# EAGLE board SKAARDUINO_v4.2 (EAGLE 7.5.0)
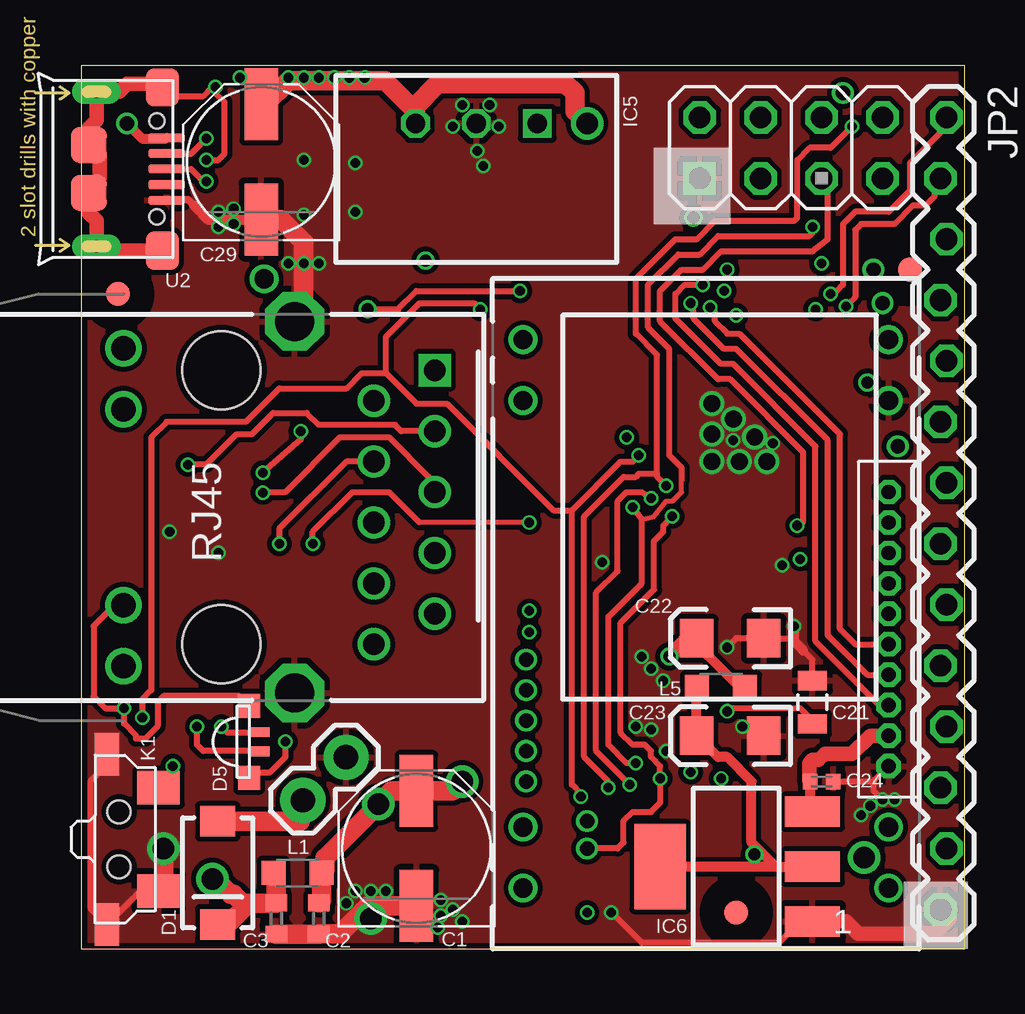
[diagram p0: board, top side]
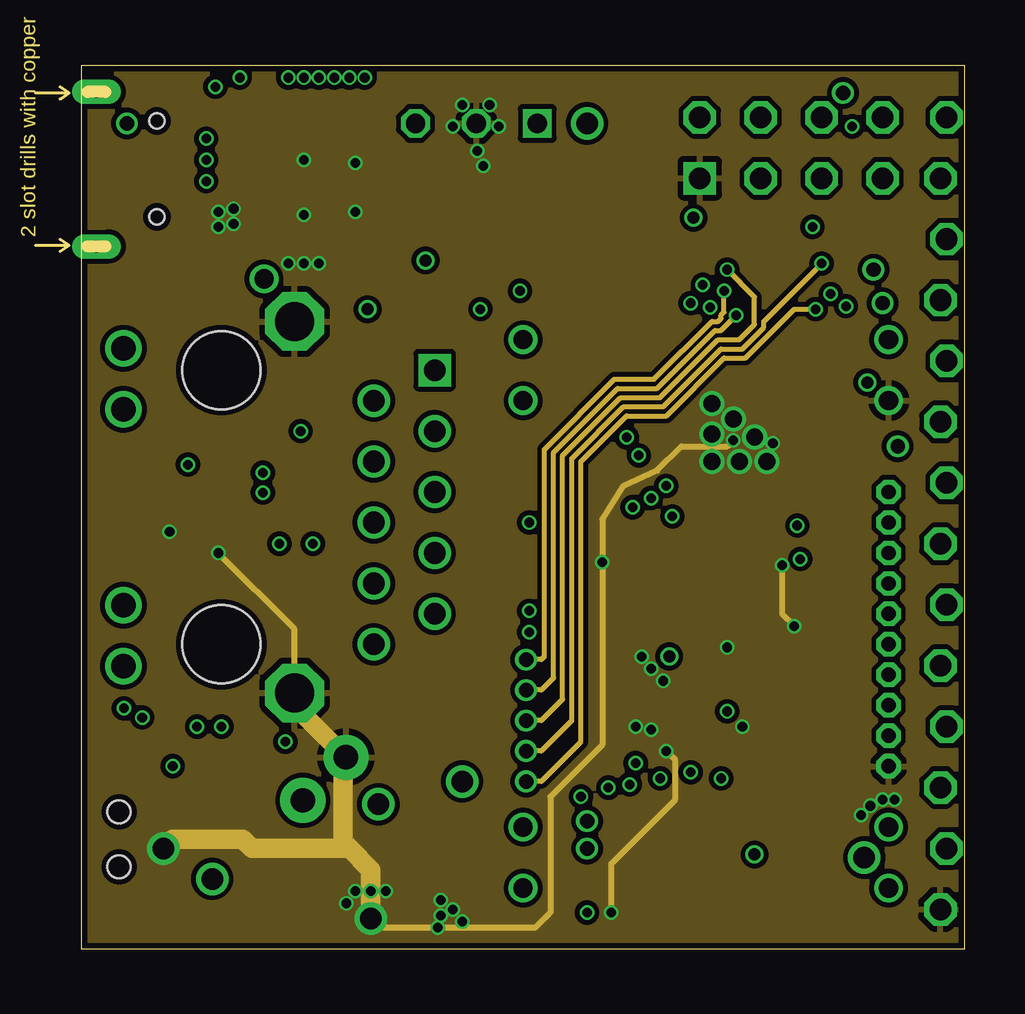
[diagram p1: board, inner layer GND]
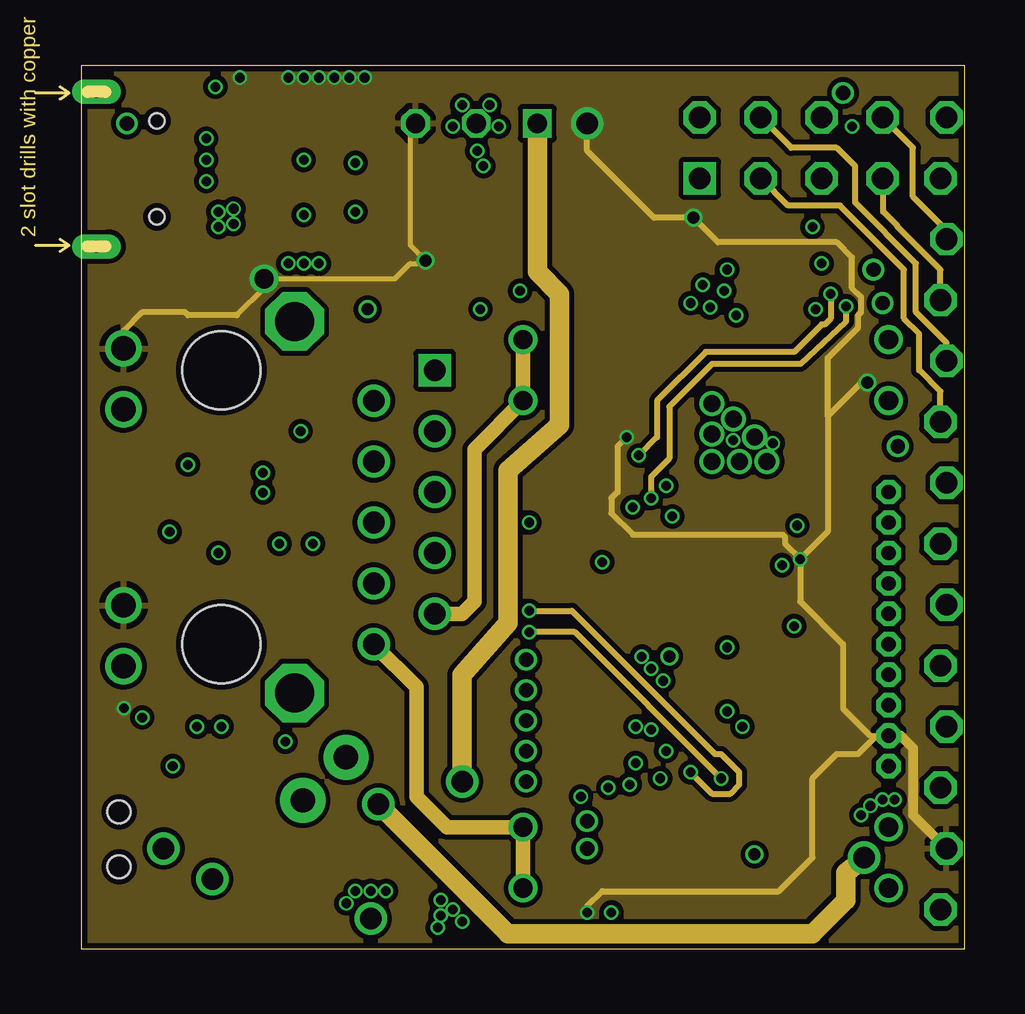
[diagram p2: board, inner layer 5V]
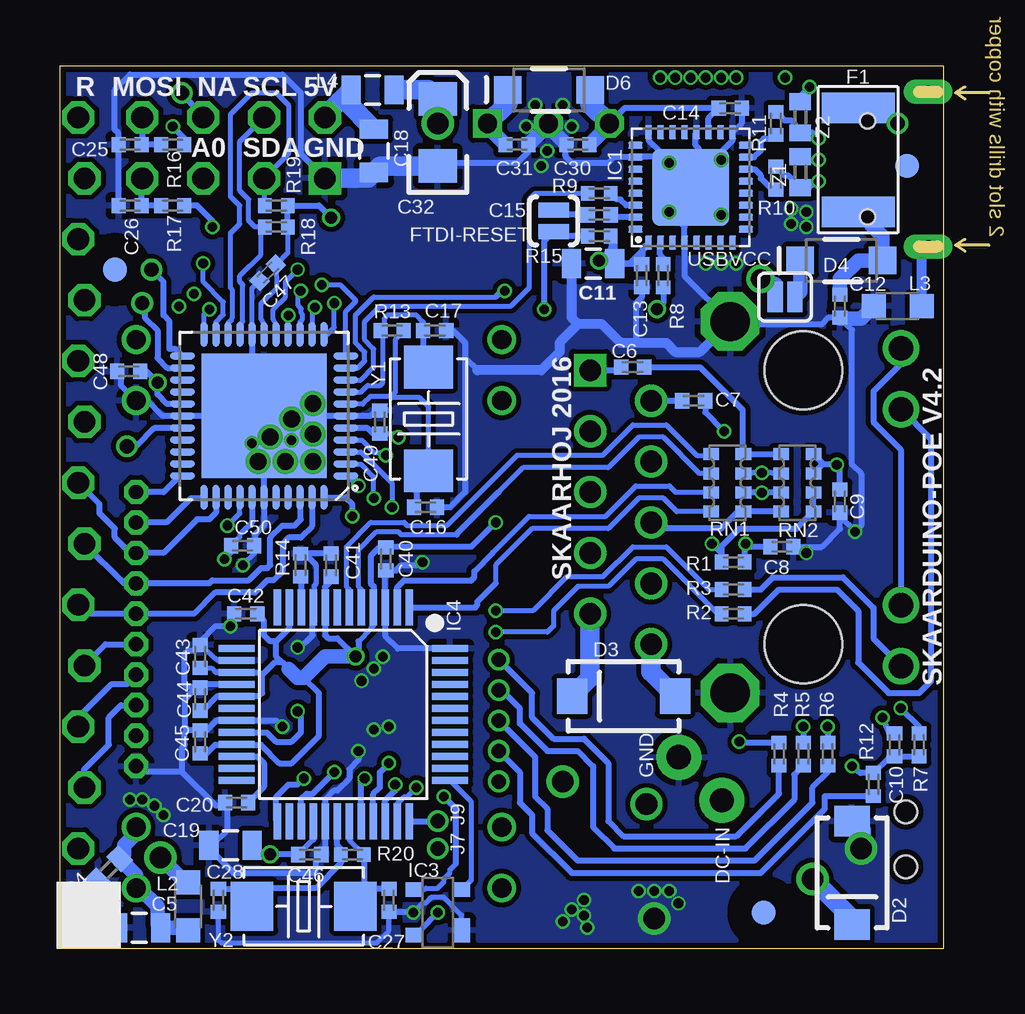
[diagram p3: board, bottom side, seen from below]

Size 36.83 x 36.83 mm. Coordinates in mm from the lower left corner, seen from the top.
Outline: 0,0 36.83,0 36.83,36.83 0,36.83 0,0
Copper layers (1*2*15*16): Top 0.035mm / dielectric 0.2mm / GND 0.0175mm / dielectric 0.3mm / 5V 0.0175mm / dielectric 0.2mm / Bottom 0.035mm
Design rules "SeeedStudio_4layer_DRU_no_angle_20140221 *": minimum track width 8mil, minimum drill 12mil, track to track 8mil, track to pad 8mil, pad to pad 8mil, via to via 8mil, smd to smd 0mil, copper to edge 10mil, drill to drill 8mil, minimum pad ring 6mil, minimum via ring 4mil, stop-mask expansion 4mil, vias tented up to drill 100mil, thermal gap 10mil
Net classes: 0 default: width 0.203 mm, clearance 0.127 mm; 1 power: width 0.203 mm, clearance 0.127 mm; 2 VIN: width 0.406 mm, clearance 0.61 mm
tKeepout: area 19.7,0 to 23,36.8
tRestrict: area 0.5,26.3 to 2.5,28.3; area 33.5,27.3 to 35.6,29.3; area 26.3,0.5 to 28.3,2.5
bRestrict: area 6.5,0.5 to 8.5,2.5; area 0.5,31.6 to 2.5,33.7; area 33.5,27.3 to 35.6,29.3

## Footprints (pad centres in the part's own frame; a part is rotated, then mirrored left to right if it is on the bottom)
PANASONIC_D = smd 3 x 1.4: + 2.4,0; - -2.4,0
C0402 = smd 0.7 x 0.9: 1 -0.65,0; 2 0.65,0
0805 = smd 0.8 x 1.2: 1 -0.9,0; 2 0.9,0
0402C = smd 0.59 x 0.64: 1 -0.48,0; 2 0.48,0
EIA3216 = smd 1.4 x 1.6: A 1.4,0; C -1.4,0
SMA-DIODE = smd 1.27 x 1.47: A -2.15,0; C 2.15,0
SOD-123 = smd 1.143 x 1.143: 1 0,0; 2 3.429,0
LED-TRICOLOR-SMD = smd 1 x 0.9: A -1.5,0; R 1.5,0 | smd 0.4 x 0.8: B 0.4,0.45; G -0.4,0.45
F1812 = smd 1.27 x 3.048: 1 -2.159,0; 2 2.159,0
FIDUCIAL-1X2.5 = smd 1 x 1: 1 0,0
SJ_2S-NO = smd 0.635 x 1.27: 1 -0.45,0; 2 0.45,0
QFN32 = smd 0.6 x 0.3: 1 -2.3,1.75; 2 -2.3,1.25; 3 -2.3,0.75; 4 -2.3,0.25; 5 -2.3,-0.25; 6 -2.3,-0.75; 7 -2.3,-1.25; 8 -2.3,-1.75; 17 2.3,-1.75; 18 2.3,-1.25; 19 2.3,-0.75; 20 2.3,-0.25; 21 2.3,0.25; 22 2.3,0.75; 23 2.3,1.25; 24 2.3,1.75 | smd 0.3 x 0.6: 9 -1.75,-2.3; 10 -1.25,-2.3; 11 -0.75,-2.3; 12 -0.25,-2.3; 13 0.25,-2.3; 14 0.75,-2.3; 15 1.25,-2.3; 16 1.75,-2.3; 25 1.75,2.3; 26 1.25,2.3; 27 0.75,2.3; 28 0.25,2.3; 29 -0.25,2.3; 30 -0.75,2.3; 31 -1.25,2.3; 32 -1.75,2.3 | smd 3.2 x 3.2: EXP 0,0
QFN-44M1 = smd 0.3 x 1.05: 1 -2.5,-3.4; 2 -2,-3.4; 3 -1.5,-3.4; 4 -1,-3.4; 5 -0.5,-3.4; 6 0,-3.4; 7 0.5,-3.4; 8 1,-3.4; 9 1.5,-3.4; 10 2,-3.4; 11 2.5,-3.4; 23 2.5,3.4; 24 2,3.4; 25 1.5,3.4; 26 1,3.4; 27 0.5,3.4; 28 0,3.4; 29 -0.5,3.4; 30 -1,3.4; 31 -1.5,3.4; 32 -2,3.4; 33 -2.5,3.4 | smd 1.05 x 0.3: 12 3.4,-2.5; 13 3.4,-2; 14 3.4,-1.5; 15 3.4,-1; 16 3.4,-0.5; 17 3.4,0; 18 3.4,0.5; 19 3.4,1; 20 3.4,1.5; 21 3.4,2; 22 3.4,2.5; 34 -3.4,2.5; 35 -3.4,2; 36 -3.4,1.5; 37 -3.4,1; 38 -3.4,0.5; 39 -3.4,0; 40 -3.4,-0.5; 41 -3.4,-1; 42 -3.4,-1.5; 43 -3.4,-2; 44 -3.4,-2.5 | smd 5.2 x 5.2: TGND 0,0
SOT143-R = smd 1 x 0.7: 1 -0.75,-1 | smd 0.6 x 0.7: 2 0.95,-1; 3 0.95,1; 4 -0.95,1
LQFP-48 = smd 1.5 x 0.3: 1 -4.45,2.75; 2 -4.45,2.25; 3 -4.45,1.75; 4 -4.45,1.25; 5 -4.45,0.75; 6 -4.45,0.25; 7 -4.45,-0.25; 8 -4.45,-0.75; 9 -4.45,-1.25; 10 -4.45,-1.75; 11 -4.45,-2.25; 12 -4.45,-2.75; 25 4.45,-2.75; 26 4.45,-2.25; 27 4.45,-1.75; 28 4.45,-1.25; 29 4.45,-0.75; 30 4.45,-0.25; 31 4.45,0.25; 32 4.45,0.75; 33 4.45,1.25; 34 4.45,1.75; 35 4.45,2.25; 36 4.45,2.75 | smd 0.3 x 1.5: 13 -2.75,-4.45; 14 -2.25,-4.45; 15 -1.75,-4.45; 16 -1.25,-4.45; 17 -0.75,-4.45; 18 -0.25,-4.45; 19 0.25,-4.45; 20 0.75,-4.45; 21 1.25,-4.45; 22 1.75,-4.45; 23 2.25,-4.45; 24 2.75,-4.45; 37 2.75,4.45; 38 2.25,4.45; 39 1.75,4.45; 40 1.25,4.45; 41 0.75,4.45; 42 0.25,4.45; 43 -0.25,4.45; 44 -0.75,4.45; 45 -1.25,4.45; 46 -1.75,4.45; 47 -2.25,4.45; 48 -2.75,4.45
RECOM_785.0-1.0 = drill 0.8 square: P$1 -2.54,0 | drill 0.8 octagon: P$2 0,0; P$3 2.54,0
SOT-223 = smd 1.27 x 2.286: 1 -2.286,-3.175; 2 0,-3.175; 3 2.286,-3.175 | smd 3.556 x 2.159: TER 0,3.175
M1X1 = drill 0.6 pad 0.813: 1 0,0
1X02 = drill 1.016 pad 1.88: 1 0,0; 2 2.54,0
M2X4SMALLER = drill 0.9 square: 1 -1.27,3.81 | drill 0.9 octagon: 2 1.27,3.81; 3 -1.27,1.27; 4 1.27,1.27; 5 -1.27,-1.27; 6 1.27,-1.27; 7 -1.27,-3.81; 8 1.27,-3.81
M10X1 = drill 0.6 pad 1.016 octagon: 1 0,0; 2 0,1.27; 3 0,2.54; 4 0,3.81; 5 0,5.08; 6 0,6.35; 7 0,7.62; 8 0,8.89; 9 0,10.16; 10 0,11.43
1X14_LOCK = drill 0.9 octagon: 1 0,0.127; 2 2.54,-0.127; 3 5.08,0.127; 4 7.62,-0.127; 5 10.16,0.127; 6 12.7,-0.127; 7 15.24,0.127; 8 17.78,-0.127; 9 20.32,0.127; 10 22.86,-0.127; 11 25.4,0.127; 12 27.94,-0.127; 13 30.48,0.127; 14 33.02,-0.127
SW4-SMD-7.0X3.5X3.5MM-90D = smd 1.397 x 1.778: 1 -2.159,1.651; 2 2.159,1.651 | smd 1.778 x 1.016: S1 -3.556,-0.508; S2 3.556,-0.508 | hole 0.95: -1.15,0; 1.15,0
L2012C = smd 1 x 1: 1 -1,0; 2 1,0
0402 = smd 0.571 x 0.62: 1 -0.48,0; 2 0.48,0
CAY16 = smd 0.5 x 0.65: 1 -1.2,-0.675; 2 -0.4,-0.675; 3 0.4,-0.675; 4 1.2,-0.675; 5 1.2,0.675; 6 0.4,0.675; 7 -0.4,0.675; 8 -1.2,0.675
HY931147C = drill 1.63 octagon: GND1 3.05,7.745; GND2 3.05,-7.745 | drill 0.9 square: P$1 8.89,5.715 | drill 0.9: P$2 6.35,4.445; P$3 8.89,3.175; P$4 6.35,1.905; P$5 8.89,0.635; P$6 6.35,-0.635; P$7 8.89,-1.905; P$8 6.35,-3.175; P$9 8.89,-4.445; P$10 6.35,-5.715 | drill 1.016: P$11 -4.08,6.625; P$12 -4.08,4.085; P$13 -4.08,-4.085; P$14 -4.08,-6.625 | hole 3.25: 0,5.715; 0,-5.715
MICRO-USB5+4P-SMD-0.65-B = smd 0.381 x 1.524: 1 -1.3,-0.25; 2 -0.65,-0.25; 3 0,-0.25; 4 0.65,-0.25; 5 1.3,-0.25 | smd 1.6 x 1.397: S1 -3.4,-0.427; S6 3.4,-0.427 | drill 0.508 pad 1.016 long: S2 -3.226,-3.175; S5 3.226,-3.175 | smd 1.5 x 1.5: S3 -1,-3.5; S4 1,-3.5 | hole 0.635: -2,-0.65; 2,-0.65
AG9800PTH = drill 0.8: P1 -7.62,11.43; P2 -7.62,8.89; P3 -7.62,-8.89; P4 -7.62,-11.43; P5 7.62,-11.43; P6 7.62,-8.89; P7 7.62,8.89; P8 7.62,11.43
SJ_2S = smd 0.635 x 1.27: 1 -0.412,0; 2 0.412,0
X2-SMD-5.0X3.2X1.3MM = smd 1.778 x 2.032: 1 -2.159,0; 2 2.159,0

## Placement (x,y rotation side)
C1  100uF/25V  [PANASONIC_D]  13.97,4.19 90 top
C2  100nF/25V  [C0402]  9.91,1.27 270 top
C3  100nF/25V  [C0402]  8.13,1.27 270 top
C4  100nF/25V  [C0402]  34.8,3.3 225 bottom
C5  10uF/25V  [0805]  33.53,0.89 180 bottom
C6  6.8nF  [0402C]  12.95,24.26 180 bottom
C7  6.8nF  [0402C]  10.41,22.86 180 bottom
C8  22nF  [0402C]  6.73,16.76 180 bottom
C9  10nF  [0402C]  4.32,18.67 90 bottom
C10  1uF  [0402C]  2.03,8.51 270 bottom
C11  22uF  [0805]  14.61,28.57 180 bottom
C12  1uF  [0402C]  4.32,26.8 90 bottom
C13  100nF  [0402C]  12.57,28.07 90 bottom
C14  100nF  [0402C]  8.89,35.05 180 bottom
C15  100nF  [0402C]  14.35,30.61 180 bottom
C16  22pF  [0402C]  21.59,18.41 180 bottom
C17  22pF  [0402C]  21.21,25.78 180 bottom
C18  22uF/6.3V  [0805]  23.75,33.27 90 bottom
C19  10uF/16V  [0805]  29.72,4.32 180 bottom
C20  10nF  [0402C]  29.46,6.1 180 bottom
C21  4.7uF  [0805]  30.48,10.29 90 top
C22  10uF 6.3V A TANT  [EIA3216]  27.05,12.95 180 top
C23  10uF 6.3V A TANT  [EIA3216]  27.05,8.89 180 top
C24  100nF  [0402C]  30.86,6.99 0 top
C25  22pF  [0402C]  33.91,33.53 0 bottom
C26  22pF  [0402C]  33.91,30.99 0 bottom
C27  18pF  [0402C]  23.11,2.03 90 bottom
C28  18pF  [0402C]  30.23,2.03 90 bottom
C29  330uF/6.3V  [PANASONIC_D]  7.5,32.81 90 top
C30  100nF  [0402C]  15.24,33.53 180 bottom
C31  100nF/25V  [0402C]  17.78,33.53 0 bottom
C32  10uF 6.3V A TANT  [EIA3216]  21.08,34.04 90 bottom
C40  100nF  [0402C]  23.24,16.26 270 bottom
C41  100nF  [0402C]  25.53,16 90 bottom
C42  100nF  [0402C]  29.08,13.97 180 bottom
C43  100nF  [0402C]  30.99,12.19 90 bottom
C44  100nF  [0402C]  30.99,10.41 90 bottom
C45  100nF  [0402C]  30.99,8.64 90 bottom
C46  100nF  [0402C]  26.42,3.94 0 bottom
C47  100nF  [0402C]  28.17,28.19 225 bottom
C48  100nF  [0402C]  33.96,24.08 180 bottom
C49  100nF  [0402C]  23.5,21.97 90 bottom
C50  100nF  [0402C]  29.21,16.81 0 bottom
D1  MBRA210LT3G  [SMA-DIODE]  5.68,3.17 270 top
D2  SMAJ58CA  [SMA-DIODE]  3.81,3.17 270 bottom
D3  SMAJ58CA  [SMA-DIODE]  13.34,10.54 180 bottom
D4  MBR0520  [SOD-123]  5.97,28.7 0 bottom
D5  KPFA-3010RGBC-11  [LED-TRICOLOR-SMD]  7,8.64 270 top
D6  MBR0520  [SOD-123]  18.16,35.81 0 bottom
F1  SMD-PPTC-500MA-15V(1812)  [F1812]  3.56,32.89 270 bottom
FID1  FIDUCIAL1X2.5  [FIDUCIAL-1X2.5]  1.52,27.3 0 top
FID2  FIDUCIAL1X2.5  [FIDUCIAL-1X2.5]  1.52,32.64 0 bottom
FID3  FIDUCIAL1X2.5  [FIDUCIAL-1X2.5]  34.54,28.32 0 top
FID4  FIDUCIAL1X2.5  [FIDUCIAL-1X2.5]  7.49,1.52 0 bottom
FID5  FIDUCIAL1X2.5  [FIDUCIAL-1X2.5]  27.3,1.52 0 top
FID8  FIDUCIAL1X2.5  [FIDUCIAL-1X2.5]  34.54,28.32 0 bottom
FTDI-RESET  SOLDERJUMPERNO  [SJ_2S-NO]  16.26,30.35 270 bottom
IC1  FT232RQ  [QFN32]  10.54,31.75 90 bottom
IC2  ATMEGA1284P  [QFN-44M1]  28.32,22.23 90 bottom
IC3  APX811-44UG-7  [SOT143-R]  21.08,1.52 90 bottom
IC4  WizNet W5500  [LQFP-48]  25.02,9.78 270 bottom
IC5  RECOM 785.0-1.0  [RECOM_785.0-1.0]  16.47,34.42 180 top
IC6  LD1117S33CTR  [SOT-223]  27.3,3.44 90 top
J1  SS  [M1X1]  18.54,10.79 0 top
J2  DC IN JACK  [1X02]  9.24,6.2 45 top
J3  SS  [M1X1]  18.54,9.53 0 top
J4  SS  [M1X1]  18.54,8.26 0 top
J5  M04X2M2X4SMALLER  [M2X4SMALLER]  29.59,33.4 90 top
J6  SS  [M1X1]  18.54,6.99 0 top
J7  SS  [M1X1]  21.08,4.19 0 bottom
J8  M10_1.27  [M10X1]  33.66,7.62 0 top
J9  W_INT  [M1X1]  21.08,5.33 0 top
J10  D11  [M1X1]  33.02,28.32 0 top
J11  D12  [M1X1]  33.4,26.92 0 top
J12  AREF  [M1X1]  34.04,20.95 0 top
J13  SS  [M1X1]  18.54,12.06 0 top
J14  SS  [M1X1]  31.75,35.69 0 top
JP2  M14LOCK  [1X14_LOCK]  35.94,34.67 270 top
K1  RESET/CFG  [SW4-SMD-7.0X3.5X3.5MM-90D]  1.57,4.57 270 top
L1  Bead ILHB0805ER121V  [L2012C]  9.02,3.17 0 top
L2  Bead ILHB0805ER121V  [L2012C]  31.5,1.78 90 bottom
L3  Bead ILHB0805ER121V  [L2012C]  1.91,26.8 180 bottom
L4  Bead ILHB0805ER121V  [0805]  23.8,35.81 0 bottom
L5  1uH 250mA 0805  [L2012C]  26.67,10.92 0 top
R1  10R/1%  [0402]  8.76,16.13 180 bottom
R2  470R  [0402]  8.76,13.97 0 bottom
R3  470R  [0402]  8.76,14.99 0 bottom
R4  390R  [0402]  6.86,8.13 90 bottom
R5  540R  [0402]  5.84,8.13 90 bottom
R6  2K7  [0402]  4.83,8.13 90 bottom
R7  10K  [0402]  1.02,8.51 90 bottom
R8  1K  [0402]  11.68,28.07 270 bottom
R9  1K  [0402]  14.35,31.5 180 bottom
R10  22R  [0402]  6.99,32.13 90 bottom
R11  22R  [0402]  6.99,34.42 90 bottom
R12  100K  [0402]  2.92,6.86 90 bottom
R13  1M  [0402]  22.99,25.78 0 bottom
R14  12K4 / 1%  [0402]  26.8,16 270 bottom
R15  10K  [0402]  14.35,29.72 0 bottom
R16  100R  [0402]  32.13,33.53 0 bottom
R17  100R  [0402]  32.13,30.99 0 bottom
R18  1K5  [0402]  27.81,30.1 0 bottom
R19  1K5  [0402]  27.81,30.99 0 bottom
R20  1M  [0402]  24.64,3.94 180 bottom
RN1  33R  [CAY16]  9.02,19.43 90 bottom
RN2  49R9 1%  [CAY16]  6.1,19.43 270 bottom
U1  HY931147C-RJ45  [HY931147C]  5.84,18.41 0 top
U2  MICRO USB  [MICRO-USB5+4P-SMD-0.65-B]  3.81,32.51 270 top
U$7  AG9800PTH  [AG9800PTH]  26.04,13.97 180 top
USBVCC  SOLDERJUMPERNC  [SJ_2S]  6.6,27.18 180 bottom
Y1  20MhZ  [X2-SMD-5.0X3.2X1.3MM]  21.46,22.1 270 bottom
Y2  25MhZ  [X2-SMD-5.0X3.2X1.3MM]  26.67,1.78 180 bottom
Z1  PGB1010603  [C0402]  5.97,32.38 90 bottom
Z2  PGB1010603  [C0402]  5.97,34.67 90 bottom

## Library data of the parts
C1 C29 L1-L3 L5 = rcl
C2-C4 C22 C23 C32 FID1-FID5 FID8 Z1 Z2 = freetronics
C5 C11 C18 C19 C21 D1-D3 FTDI-RESET J2 L4 USBVCC = SparkFun
C6-C10 C12-C17 C20 C24-C28 C30 C31 C40-C50 IC2 R1-R20 U1 = freetronics-jon
D4 D6 = MySMD
D5 IC5 IC6 J1 J3-J14 JP2 U$7 = SKAARHOJ
F1 = Seeed-OPL-fuse
IC1 = ftdichip; MPN: FT232RQ; OC_FARNELL: 1146033; OC_NEWARK: 91K9919
IC3 RN1 RN2 = freetronics-master-v1
IC4 = template
K1 = Seeed-OPL-Button; MPN: TS-1188E
U2 = Seeed-OPL-Connector; MPN: ST-USB-001G
Y1 Y2 = Seeed-OPL-crystal-osctllator; MPN: X053201602002

## Nets
3V3A: C22.A C40.1 C41.1 C42.1 C43.1 C44.1 C45.1 IC4.4 IC4.8 IC4.11 IC4.15 IC4.17 IC4.21 L5.2 R1.2 RN2.5 RN2.6
3V3D [power]: C19.1 C23.A C46.1 IC4.28 IC6.2 IC6.TER L5.1
5V [power]: C11.1 C13.2 C14.2 C24.1 C29.+ C30.1 C32.A C47.1 C48.1 C49.1 C50.1 D5.A D6.2 IC1.1 IC1.19 IC2.5 IC2.17 IC2.27 IC2.38 IC3.4 IC5.P$3 IC6.3 J8.2 JP2.13 L4.2 R7.2 R15.2 R18.2 R19.2 U1.P$11 U1.P$13 USBVCC.2
A0: IC2.37 J5.5
A2: IC2.35 J8.8 JP2.7
A3: IC2.34 J8.9
A4: IC2.33 J8.10
ACTLED: IC4.27 R3.1
CFG: IC2.21 J4.1 R12.1
CFGSW: C10.2 K1.1 R7.1 R12.2
D0_RX: IC2.9 R9.2
D1_TX: IC2.10 R8.2
D2: IC2.11 J8.3 JP2.12
D3: IC2.12 J8.4 JP2.11
D4: IC2.13 J8.5 JP2.10
D5: IC2.14 J13.1 R4.1
D6: IC2.15 J1.1 R5.1
D7: IC2.16 J3.1 R6.1
D8: IC2.42 J8.7 JP2.8
D9: IC2.43 J8.6 JP2.9
D10: IC2.22 J6.1
D10_SS: IC2.44 IC4.32 J7.1
D11: IC2.23 J10.1
D11_MOSI: IC2.1 IC4.35 R16.2
D12: IC2.24 J11.1
D12_MISO: IC2.2 IC4.34 JP2.2
D13_SCK: IC2.3 IC4.33 R17.2
GND [power]: C1.- C2.2 C3.2 C4.2 C5.2 C8.1 C9.1 C11.2 C12.1 C13.1 C14.1 C16.1 C17.1 C18.1 C19.2 C20.2 C21.2 C22.C C23.C C24.2 C25.1 C26.1 C27.1 C28.1 C29.- C30.2 C31.2 C32.C C40.2 C41.2 C42.2 C43.2 C44.2 C45.2 C46.2 C47.2 C48.2 C49.2 C50.2 D2.A IC1.4 IC1.17 IC1.20 IC1.24 IC1.26 IC2.6 IC2.18 IC2.28 IC2.39 IC2.TGND IC3.1 IC4.3 IC4.9 IC4.14 IC4.16 IC4.19 IC4.29 IC4.48 IC5.P$2 IC6.1 J2.2 J5.1 J8.1 JP2.14 K1.2 K1.S1 K1.S2 L3.2 R14.1 U1.GND1 U1.GND2 U2.5 U$7.P3
I2C_SCL: IC2.19 J5.4 JP2.5 R18.1
I2C_SDA: IC2.20 J5.3 JP2.6 R19.1
LINKLED: IC4.25 R2.1
MOSI: C25.2 J5.8 JP2.3 R16.1
N$1: C8.2 R1.1 U1.P$4
N$2: C15.2 FTDI-RESET.1
N$3: D5.B R6.2
N$4 [VIN]: C3.1 D1.C D2.C L1.1
N$5: D5.G R5.2
N$6 [VIN]: C12.2 D4.2 F1.2
N$7 [VIN]: F1.1 U2.1
N$8: C16.2 IC2.7 R13.2 Y1.2
N$9: C7.2 U1.P$2
N$10: J5.6 J14.1
N$11: C6.2 U1.P$1
N$12: C17.2 IC2.8 R13.1 Y1.1
N$13 [VIN]: D1.A J2.1
N$15: D5.R R4.2
N$16: R10.2 U2.3 Z1.1
N$17: R11.2 U2.2 Z2.1
N$18: C15.1 IC1.31
N$19 [power]: C18.2 J5.2 L4.1
N$20: C21.1 IC4.20
N$21: L3.1 U2.S1 U2.S2 U2.S3 U2.S4 U2.S5 U2.S6 Z1.2 Z2.2
N$22: C20.1 IC4.22
N$23: IC4.10 R14.2
N$24: IC4.36 J9.1
N$25: IC2.29 J12.1
N$67: R3.2 U1.P$14
N$321: C9.2 RN2.7 RN2.8 U1.P$3
N$332: R2.2 U1.P$12
POE_DC_RETURN [VIN]: C4.1 C5.1 L2.1 U$7.P1 U$7.P2
POE_VIN+ [VIN]: D3.C U1.P$9 U$7.P5 U$7.P6
POE_VIN- [VIN]: D3.A U1.P$10 U$7.P7 U$7.P8
RD+: IC1.14 R10.1
RD-: IC1.15 R11.1
RESET: C10.1 FTDI-RESET.2 IC2.4 IC3.3 JP2.1 R15.1
RXIN: IC4.5 RN1.6
RXIN_E: C7.1 RN1.3 RN2.2
RXIP: IC4.6 RN1.5
RXIP_E: C6.1 RN1.4 RN2.1
SCLK: C26.2 J5.7 JP2.4 R17.1
TXON: IC4.1 RN1.8
TXON_E: RN1.1 RN2.4 U1.P$6
TXOP: IC4.2 RN1.7
TXOP_E: RN1.2 RN2.3 U1.P$5
USBRXD: IC1.30 R9.1
USBTXD: IC1.2 R8.1
USBVCC [VIN]: D4.1 USBVCC.1
VIN [VIN]: C1.+ C2.1 C31.1 D6.1 IC5.P$1 L1.2 L2.2
WIZRST: IC3.2 IC4.37
XTLN: C28.2 IC4.30 R20.2 Y2.2
XTLP: C27.2 IC4.31 R20.1 Y2.1

## Tracks (layer width: path | path; a pad name or v marks a point on that pad's centre or on a via)
3V3A  (via drill 0.4, 0.5)
  Top 0.203: v18.67,17.78 14.1,17.78
  Top 0.254: v9.65,16.89 9.65,17.4 11.3,19.05 12.83,19.05 14.1,17.78
  Top 0.406: L5.2 27.43,10.92 26.1,12.26 26.1,12.51 C22.A
  Top 0.61: C22.A 25.27,12.95 v24.51,12.19
  Bottom 0.203: C43.1 30.51,11.71 30.35,11.56 | 24.38,12.83 23.88,13.34 23.88,13.36 23.77,13.46 IC4.4
  Bottom 0.254: RN2.6 RN2.5 6.13,17.53 8.51,17.53 9.24,16.79 R1.2 9.24,16.48 v9.65,16.89 | IC4.4 23.75,14.25 23.75,15.11 23.88,15.24 23.88,16.38 23.52,16.74 C40.1 23.21,16.76 19.68,16.76 v18.67,17.78 | C41.1 25.53,15.34 25.78,15.09 IC4.8 | IC4.8 | 27.3,14.19 IC4.11 27.27,13.37 27.81,12.83 | 27.81,12.83 28.07,12.83 28.32,13.08 28.32,13.69 C42.1 | 30.35,11.56 29.5,11.56 IC4.15 28.55,11.53 28.4,11.43 | C44.1 30.88,9.93 30.28,10.54 29.48,10.54 | 29.48,10.54 IC4.17 | C45.1 30.71,8.16 30.35,8.51 29.49,8.51 | 29.49,8.51 IC4.21 | 29.49,8.51 28.45,8.51 27.69,7.75 27.18,7.75 26.04,8.89 26.04,10.67 26.67,11.3 | 24.38,12.83 24.38,12.32 v24.51,12.19 25.27,12.95 C22.A 25.78,13.08 IC4.8 | 29.48,10.54 28.57,10.54 28.4,10.67 28.4,11.43 | 27.56,11.94 27.81,12.19 27.81,12.83 | 27.3,11.68 27.56,11.94 | 27.56,11.94 27.89,11.94 28.4,11.43
  Bottom 0.61: v24.51,12.19 25.78,12.19 26.67,11.3 26.92,11.3 27.3,11.68
3V3D  (via drill 0.5)
  Top 0.254: 27.94,4.45 27.94,4.06 v28.07,3.94
  Top 0.406: 28.95,3.44 IC6.TER | 28.95,3.44 27.94,4.45 27.94,6.99 26.92,8 26.54,8 C23.A 25.65,10.9 L5.1 | 28.95,3.44 IC6.2
  Bottom 0.203: 26.27,4.56 C46.1
  Bottom 0.254: IC4.28 26.27,4.56 | C46.1 v28.07,3.94 28.44,3.94 C19.1
5V  (via drill 0.4, 0.5, 0.8, 0.9)
  Top 0.254: D5.A 6.59,10.54 3.43,10.54 3.17,10.29 3.17,9.27 2.67,8.76 2.29,8.76 2.29,8.89 1.78,9.4 v1.78,10.03 1.02,10.03 0.51,10.54 0.51,13.46 1.38,14.33 U1.P$13
  Top 0.406: C24.1 30.38,5.82 IC6.3
  Top 0.61: C24.1 30.35,7.01 30.35,7.75 30.48,7.87 30.73,7.87 30.99,8.13 32.13,8.13 32.89,8.89 J8.2
  Top 0.813: v21.08,34.42 20.57,34.92 20.57,35.69 20.19,36.07 14.86,36.07 13.93,35.14 13.93,34.92 | 13.93,34.92 IC5.P$3 | C29.+ 7.65,35.21 8.64,36.2 12.66,36.2 13.93,34.92
  5V 0.203: IC5.P$3 13.72,34.2 13.72,29.34 v14.35,28.7 14.22,28.57 C11.1 13.07,27.94 v7.62,27.94 7.62,27.56 6.48,26.42
  5V 0.254: U1.P$11 1.76,25.77 2.54,26.54 4.32,26.54 4.45,26.42 6.48,26.42 | v21.08,34.42 21.08,33.27 23.88,30.48 v25.53,30.48 26.54,29.46 31.5,29.46 32.13,28.83 32.13,27.56 32.51,27.18 32.51,26.54 32.38,26.42 32.38,25.91 31.11,24.64 31.11,22.23 | v21.08,1.52 21.08,1.78 21.72,2.41 29.08,2.41 30.48,3.81 30.48,7.11 31.5,8.13 32.38,8.13 33.15,8.89 | v29.97,16.26 29.97,14.48 31.75,12.7 31.75,10.03 32.89,8.89 33.15,8.89 | v22.73,21.34 22.35,20.95 22.35,19.05 22.1,18.8 22.1,18.16 22.99,17.27 29.23,17.27 29.34,17.17 29.34,16.89 v29.97,16.26 | v32.77,23.62 32.51,23.62 31.11,22.23 | 31.11,22.23 31.11,17.4 v29.97,16.26 | 33.15,8.89 J8.2
  5V 0.406: J8.2 34.16,8.89 34.67,8.38 34.67,5.59 JP2.13
  Bottom 0.203: IC3.4 22.08,0.78 | IC2.17 28.32,26.04 28.45,26.26 28.45,26.92 27.8,27.54 C47.1 27.33,29.03 R18.2 | R15.2 13.87,29.24 13.84,29.21 v14.35,28.7 | 29.21,17.4 29.34,17.27 29.34,17.17 C50.1 29.69,16.54 v29.97,16.26 | C49.1 22.89,21.49 v22.73,21.34
  Bottom 0.254: R7.2 1.02,9.27 v1.78,10.03 | U1.P$11 1.76,24.4 2.92,23.24 2.92,21.97 1.78,20.83 1.78,14.35 U1.P$13 | C11.1 13.68,28.55 C13.2 12.54,29.21 IC1.1 12.29,29.36 13.08,28.57 C11.1 | C11.1 | 24.66,21.72 IC2.5 24.91,21.72 24,21.72 23.78,21.49 C49.1 | IC2.38 28.83,18.82 28.83,17.78 29.21,17.4 | IC1.19 9.79,34.63 C14.2 13.29,35.05 IC5.P$3 | C11.1 13.71,29.55 R15.2 | R18.2 R19.2 26.04,30.99 v25.53,30.48 | 22.08,0.78 21.83,0.78 v21.08,1.52 | C48.1 33.22,24.08 v32.77,23.62 32.77,23.11 32.38,22.73 IC2.27
  Bottom 0.61: C30.1 13.93,34.36 IC5.P$3 | USBVCC.2 7.02,27.72 v7.62,27.94
  Bottom 0.813: IC5.P$3 14.73,35.22 D6.2 | L4.2 21.46,35.81 C32.A v21.08,34.42
  other vias: 6.6,36.32 8.64,36.32 9.27,36.32 9.91,36.32 10.54,36.32 11.18,36.32 11.81,36.32
  pour 5V: 0,0 36.83,0 36.83,36.83 0,36.83
A0  (via drill 0.4)
  Top 0.254: J5.5 31.11,31.88 31.11,29.59 30.48,29.08 26.67,29.08 25.91,28.32 25.02,28.32 24.13,27.43 24.13,26.16 26.54,23.75 27.05,23.75 30.1,20.7 30.1,17.78 29.97,17.78 v29.84,17.65
  Bottom 0.203: v29.84,17.65 29.34,18.16 29.34,18.81 IC2.37
A2
  Bottom 0.254: IC2.35 30.32,18.19 30.61,17.91 31.11,17.91 32.51,16.51 J8.8 33.91,16.51 34.54,17.14 34.54,17.53 35.18,18.16 35.18,18.54 JP2.7
A3
  Bottom 0.254: IC2.34 30.85,18.8 31.37,18.8 32.38,17.78 J8.9
A4
  Bottom 0.254: IC2.33 31.84,19.73 32.51,19.05 J8.10
ACTLED  (via drill 0.4)
  5V 0.254: v25.4,7.37 26.29,6.48 27.05,6.48 27.43,6.86 27.43,7.37 26.67,8.13 26.42,8.13 20.45,14.1 v18.67,14.1
  Bottom 0.203: R3.1 9.78,14.99 11.56,16.76 12.95,16.76 14.2,15.52 15.7,15.52 17.12,14.1 v18.67,14.1
  Bottom 0.254: IC4.27 26.77,6.25 26.54,6.48 26.29,6.48 v25.4,7.37
CFG  (via drill 0.4)
  GND 0.203: v30.86,28.57 28.45,26.16 28.45,25.91 27.56,25.02 26.67,25.02 24.26,22.61 22.61,22.61 20.45,20.45 20.45,9.53 19.18,8.26 J4.1
  Bottom 0.203: IC2.21 30.32,26.14 30.02,26.44 30.02,26.98 30.86,27.81 v30.86,28.57
  Bottom 0.254: J4.1 17.65,7.37 17.65,6.1 17.14,5.59 17.14,4.83 15.49,3.17 7.62,3.17 4.95,5.84 4.95,6.35 4.92,6.38 R12.1
CFGSW  (via drill 0.4)
  Top 0.254: v3.81,7.62 3.48,6.99 K1.1
  Bottom 0.254: R7.1 C10.2 2.09,7.97 2.29,7.97 R12.2 3.46,7.34 v3.81,7.62
D0_RX
  Bottom 0.203: IC2.9 24.28,23.73 23.75,24.26 23.75,25.02 24.13,25.4 24.13,26.16 23.5,26.8 18.03,26.8 17.27,27.56 17.27,31.24 17.02,31.5 R9.2
D1_TX  (via drill 0.4, 0.5)
  Top 0.254: v11.94,26.67 13.21,26.67 13.97,27.43 v18.29,27.43
  Bottom 0.203: IC2.10 24.42,24.23 24.13,24.51 24.13,24.89 24.51,25.27 24.51,26.42 23.75,27.18 18.67,27.18
  Bottom 0.254: R8.2 11.68,26.92 v11.94,26.67 | v18.29,27.43 18.41,27.43 18.67,27.18
D2  (via drill 0.4)
  Top 0.254: v25.91,27.69 25.15,27.69 24.77,27.3 24.77,26.29 26.67,24.38 27.18,24.38 30.61,20.95 30.61,12.83 33.27,10.16 J8.3
  Bottom 0.203: IC2.11 24.92,26.57 24.51,26.98 24.51,27.05 25.15,27.69 v25.91,27.69
  Bottom 0.254: JP2.12 35.81,7.49 34.8,8.51 34.8,9.65 34.29,10.16 J8.3
D3  (via drill 0.4)
  Top 0.254: v25.4,26.92 25.53,26.8 25.53,26.29 26.8,25.02 27.3,25.02 31.11,21.21 31.11,13.08 32.77,11.43 J8.4
  Bottom 0.203: IC2.12 25.68,25.62 25.4,25.91 v25.4,26.92
  Bottom 0.254: JP2.11 36.07,9.65 34.67,11.05 34.04,11.05 J8.4
D4  (via drill 0.4)
  Top 0.254: v26.21,26.75 26.42,26.54 26.42,26.16 26.92,25.65 27.43,25.65 31.62,21.46 31.62,13.34 32.26,12.7 J8.5
  Bottom 0.203: 26.29,25.66 26.29,26.67 v26.21,26.75
  Bottom 0.254: 26.29,25.66 IC2.13 | JP2.10 34.92,12.7 J8.5
D5  (via drill 0.4)
  GND 0.203: v26.8,27.43 26.8,26.54 26.67,26.42 26.67,26.29 26.54,26.16 26.29,26.16 23.88,23.75 22.23,23.75 19.3,20.83 19.3,12.19 19.18,12.06 J13.1
  Bottom 0.203: IC2.14 26.82,26.14 26.72,26.24 26.72,26.47 26.77,26.52 26.77,26.7 26.9,26.82 26.9,27.33 v26.8,27.43
  Bottom 0.254: J13.1 17.14,10.67 17.14,9.65 16.26,8.76 14.99,8.76 13.97,7.75 13.97,5.33 13.34,4.7 8.64,4.7 6.86,6.48 R4.1
D6  (via drill 0.4)
  GND 0.203: v27.3,26.42 26.67,25.78 26.42,25.78 24,23.37 22.35,23.37 19.68,20.7 19.68,11.3 19.18,10.79 J1.1
  Bottom 0.203: IC2.15 27.32,26.4 v27.3,26.42
  Bottom 0.254: J1.1 18.41,10.79 17.65,10.03 17.65,9.4 16.51,8.26 15.24,8.26 14.61,7.62 14.61,5.08 13.72,4.19 8.26,4.19 6.22,6.22 6.22,7.27 R5.1
D7  (via drill 0.4)
  GND 0.203: v26.92,28.32 28.07,27.18 28.07,26.04 27.43,25.4 26.54,25.4 24.13,22.99 22.48,22.99 20.07,20.57 20.07,10.41 19.18,9.53 J3.1
  Bottom 0.203: IC2.16 27.82,26.04 27.94,26.24 27.94,26.67 27.43,27.18 27.43,27.81 v26.92,28.32
  Bottom 0.254: J3.1 17.02,8 17.02,6.35 16.51,5.84 16.51,4.95 15.24,3.68 7.87,3.68 5.46,6.1 5.46,6.73 4.83,7.37 R6.1
D8
  Bottom 0.254: IC2.42 26.8,18.8 26.8,17.91 27.05,17.65 27.56,17.65 28.07,17.14 28.07,16 28.19,15.88 28.45,15.88 28.96,15.37 30.48,15.37 30.61,15.24 J8.7 34.16,15.24 JP2.8
D9
  Bottom 0.254: IC2.43 26.32,17.62 26.8,17.14 27.3,17.14 27.56,16.89 27.56,15.75 27.94,15.37 28.19,15.37 28.7,14.86 30.35,14.86 31.24,13.97 J8.6 35.69,13.97 JP2.9
D10  (via drill 0.4)
  GND 0.203: v30.61,26.67 29.72,26.67 27.69,24.64 26.8,24.64 24.38,22.23 22.73,22.23 20.83,20.32 20.83,8.64 19.18,6.99 J6.1
  Bottom 0.203: IC2.22 30.82,26.46 v30.61,26.67
D10_SS  (via drill 0.4)
  Top 0.254: J7.1 22.35,4.19 22.61,4.45 22.61,5.33 22.99,5.71 23.75,5.71 24.13,6.1 v24.13,7.11 24.13,7.62 23.75,8 23.75,8.26 23.5,8.51 22.99,8.51 22.48,9.02 22.48,13.59 23.88,14.99 23.88,17.02 24.26,17.4 24.26,17.65 v24.64,18.03
  Bottom 0.254: IC2.44 24.92,18.82 24.64,18.54 v24.64,18.03 | IC4.32 24.27,6.97 v24.13,7.11
D11
  Bottom 0.254: IC2.23 32.02,25.02 32.26,25.02 32.26,26.16 32.51,26.42 32.51,27.81 J10.1
D11_MOSI  (via drill 0.4)
  Top 0.254: 24.13,19.56 v24.38,19.3 24,19.68 24,19.81 | v21.97,6.73 21.97,6.99 20.95,8 20.95,18.03 22.61,19.68 23.11,19.68 23.24,19.81 24,19.81 | 24,19.81 24,24.77 23.11,25.65 23.11,27.94 24.77,29.59 25.65,29.59 26.42,30.35 29.72,30.35 29.84,30.48 29.84,32.89 30.35,33.4 31.24,33.4 v32.13,34.29
  Bottom 0.203: IC4.35 22.77,6.06 22.48,6.35 22.35,6.35 v21.97,6.73
  Bottom 0.254: IC2.1 24.8,19.73 v24.38,19.3 | R16.2 31.52,33.4 31.52,33.68 v32.13,34.29
D12
  Bottom 0.254: 31.75,24.26 IC2.24 32.35,24.23 32.77,24.64 32.77,25.78 33.27,26.29 33.27,26.8 J11.1
D12_MISO  (via drill 0.4)
  Top 0.254: v22.86,6.86 21.46,8.26 21.46,14.86 22.35,15.75 22.35,18.67 22.73,19.05 23.37,19.05 v23.75,18.8 | v31.88,26.8 32.26,27.18 32.26,29.97 32.51,30.23 33.91,30.23 34.67,30.99 35.18,30.99 35.56,31.37 35.56,31.88 JP2.2
  5V 0.254: v23.75,18.8 23.75,19.68 24.51,20.45 24.51,22.61 26.29,24.38 29.97,24.38 31.88,26.16 v31.88,26.8
  Bottom 0.203: v23.75,18.8 23.75,19.68 24.26,20.19 24.89,20.19
  Bottom 0.254: 24.89,20.19 IC2.2 | IC4.34 23.27,6.2 22.86,6.6 v22.86,6.86
D13_SCK  (via drill 0.4)
  Top 0.203: 23.37,17.91 23.88,18.03 24.38,18.67 24.64,18.67 25.02,19.05 25.02,19.56
  Top 0.254: v23.11,7.75 22.73,7.75 21.97,8.51 21.97,13.84 23.37,15.24 23.37,17.91 v22.99,18.41 | 25.02,19.56 25.02,20.07 24.51,20.57 24.51,25.02 23.62,25.91 23.62,27.69 24.89,28.96 25.78,28.96 26.54,29.72 30.35,29.72 30.48,29.84 v30.48,30.1
  Bottom 0.203: IC2.3 24.28,20.73 22.99,19.43 v22.99,18.41
  Bottom 0.254: IC4.33 23.77,6.46 23.5,6.73 23.5,7.37 v23.11,7.75 | v30.48,30.1 30.48,30.35 31.11,30.99 R17.2
GND  (via drill 0.4, 0.7, 0.9)
  Top 0.254: K1.S1 1.06,7.67 0.38,6.99 0.38,1.7 K1.S2 2.46,2.41 K1.2 | C23.C 28.19,8.89 v27.56,9.27 | v26.92,12.57 27.3,12.95 C22.C 29.59,12.95 29.72,12.83 | C21.2 30.48,12.06 29.84,12.7 | C24.2 33.02,6.99 | 33.02,6.99 J8.1 | 33.02,6.99 33.02,6.6 v33.4,6.22 | IC6.1 29.98,1.15 29.08,0.25 23.37,0.25 v22.1,1.52
  Top 0.305: U2.5 3.59,31.24 4.45,31.24 4.7,30.99
  Top 0.406: 30.1,12.45 29.84,12.7 29.72,12.83 v29.72,13.46 | 4.7,30.99 5.28,30.41 C29.-
  Top 0.61: IC6.1 31.87,1.15 32.38,0.64 35.56,0.64 36.2,1.27 JP2.14
  Top 0.813: C3.2 C2.2 9.92,0.64 10.79,0.64 11.75,1.59 | 11.75,1.59 11.95,1.79 C1.- | v12.06,1.27 11.75,1.59 | K1.2 3.43,2.62 v3.43,4.19 | C29.- 8.32,30.41 9.27,29.46 9.27,26.54 U1.GND1
  GND 0.254: U1.GND2 8.89,13.33 v5.71,16.51 | v22.1,1.52 22.1,3.56 24.77,6.22 24.77,7.87 v24.38,8.26 | v27.18,21.21 26.92,20.95 25.02,20.95 24,19.94 22.61,19.3 21.72,17.91 v21.72,16.13 21.72,8.51 19.56,6.35 19.56,1.52 18.92,0.89 12.45,0.89 v12.06,1.27 | v29.21,16 29.21,13.97 v29.72,13.46
  GND 0.813: U1.GND2 8.89,10.13 J2.2 10.92,7.88 10.92,4.45 11.18,4.19 | 11.18,4.19 12.06,3.3 v12.06,1.27 | v3.43,4.19 3.81,4.57 6.73,4.57 7.11,4.19 11.18,4.19
  Bottom 0.203: 26.16,16 26.16,15.21 26.24,15.14 26.24,14.26 | 30.96,12.67 30.25,12.04 29.5,12.04 | IC2.39 28.32,20.19 28.45,20.32 | v28.57,20.32 28.57,20.83 v28.83,21.08 | C28.1 30.23,0.38 30.1,0.25 23.62,0.25 23.11,0.76 C27.1 | IC2.18 28.82,27.54 C47.2 | IC3.1 20.08,1.41 20.83,2.16 21.34,2.16 21.59,1.91 21.72,1.91 v22.1,1.52 | 28.7,16.66 28.7,16.51 v29.21,16
  Bottom 0.254: 4.42,18.16 C9.1 | v5.71,16.51 5.71,16.74 C8.1 5.08,16.76 4.32,17.53 C9.1 | C14.1 8.41,34.43 IC1.17 8.79,33.7 9.35,33.15 | 9.35,33.15 10.19,33.15 10.21,33.17 | 10.21,33.17 10.21,33.38 10.34,33.5 10.34,34 IC1.20 | IC1.24 12.29,33.7 11.84,33.25 11.84,33.22 11.63,33.02 | 11.63,33.02 12.82,33.02 IC1.26 13.74,33 13.97,32.77 15.49,32.77 15.75,33.02 15.75,33.5 C30.2 | 11.63,33.02 11.56,33.02 | 11.56,33.02 10.36,33.02 10.21,33.17 | 9.35,33.15 9.27,33.07 v9.27,32.89 v9.27,30.61 | 11.56,33.02 11.43,32.89 v11.43,32.77 v11.43,30.73 10.79,30.09 IC1.4 10.79,28.06 U1.GND1 8.77,26.04 5.08,26.04 4.8,26.32 C12.1 3.81,25.81 3.81,20.19 3.43,19.81 3.43,17.65 v3.68,17.4 4.32,18.03 C9.1 | C49.2 23.65,22.45 23.88,22.23 IC2.6 IC2.TGND | C17.1 20.45,25.78 19.94,25.27 19.94,24.64 | 19.94,24.64 19.94,19.05 20.57,18.41 C16.1 | 19.94,24.64 19.43,24.13 | C41.2 R14.1 26.64,16.48 26.16,16 | 26.24,14.26 IC4.9 26.29,14.21 26.29,13.08 26.54,12.83 v26.92,12.57 | C43.2 30.96,12.67 31.11,12.83 | 29.5,12.04 IC4.14 | 29.84,9.53 | IC2.18 28.82,22.73 IC2.TGND | IC2.TGND IC2.28 32.56,22.23 33.2,22.86 U$7.P3 34.29,23.5 34.29,23.93 C48.2 | IC2.TGND IC2.39 28.32,17.65 28.7,17.27 28.7,16.66 C50.2 | C46.2 25.94,4.16 | 31.14,9.27 C45.2 | C27.1 22.13,1.55 v22.1,1.52 | IC4.48 22.75,12.53 23.27,13.05 IC4.3 23.27,15.75 C40.2 22.83,15.78 22.61,16 21.84,16 v21.72,16.13 | C42.2 29.56,13.87 v29.72,13.46 30.35,13.46 30.99,12.83 C43.2 | v27.18,21.21 27.3,21.21 IC2.TGND | 29.84,9.53 30.3,9.53 30.71,9.12 C45.2 | 31.5,9.14 31.62,9.27 31.62,10.41 31.14,10.89 C44.2 30.85,11.03 IC4.16 31.01,11.03 31.11,10.92 31.5,10.92 31.62,11.05 31.62,12.32 31.5,12.45 31.21,12.45 C43.2
  Bottom 0.254: 31.5,9.14 31.02,9.14 C45.2 | 31.5,9.14 31.62,9.02 31.62,8.51 31.75,8.38 31.75,7.39 | v24.38,8.26 24.38,7.87 24.77,7.49 24.77,7.11 25.27,6.6 25.4,6.6 25.78,6.22 IC4.29 25.77,4.1 C46.2 | 29.84,9.53 IC4.19 27.81,9.53 v27.56,9.27 | C13.1 12.57,27.18 12.83,26.92 12.83,25.4 12.7,25.27 | C31.2 17.3,33.25 17.78,32.77 20.95,32.77 C32.C | C25.1 C26.1 34.39,34.01 34.54,34.16 34.54,35.81 33.91,36.45 27.56,36.45 26.8,35.69 26.8,33.15 J5.1 | C46.2 26.16,3.71 26.16,3.3 26.29,3.17 29.59,3.17 30.62,4.2 C19.2 30.48,4.32 29.84,4.95 29.84,6 C20.2 30.07,5.97 30.32,5.97 31.75,7.39 | 31.75,7.39 33.43,7.39 J8.1
  Bottom 0.406: U1.GND1 10.16,24.89 11.18,24.89 11.56,25.27 12.7,25.27 13.46,25.27 14.23,26.05 15.23,26.05 | 15.23,26.05 16,25.27 16,24.89 16.76,24.13 19.43,24.13 | C11.2 15.51,26.32 15.23,26.05
  Bottom 0.61: L3.2 2.92,26.8 3.43,26.29 4.29,26.29 C12.1 | v26.29,22.73 26.54,22.73 v27.18,22.1 v27.18,21.21 | 27.3,21.21 27.94,21.21 v28.07,21.34 | v28.57,20.32 28.45,20.32 v27.43,20.32 27.43,20.95 v27.18,21.21 | v26.29,21.46 26.92,21.46 v27.18,21.21 | v26.29,20.32 v27.18,21.21 | C30.2 16.47,34.28 IC5.P$2 16.47,34.36 C31.2 | C4.2 35.26,2.21 JP2.14 35.05,0.89 C5.2
  Bottom 0.813: D2.A 3.43,4.94 v3.43,4.19 | J5.1 23.99,32.13 C18.1 23.49,32.64 C32.C
  other vias: 23.37,12.19 23.75,11.68 24.26,11.18 23.11,9.27 23.75,9.14 32.51,5.59 32.89,5.97 33.91,6.22 14.99,2.03 14.99,1.4 14.86,0.89 15.49,1.65 15.88,1.14 12.7,2.41 12.06,2.41 11.43,2.41 11.05,1.91 15.49,34.29 17.4,34.29 16.51,33.27 16.76,32.64 15.88,35.18 17.02,35.18 8.64,28.57 9.27,28.57 9.91,28.57 5.71,30.1 6.35,30.23 6.35,30.86 5.71,30.73
  pour Bottom: 0,0 36.83,0 36.83,36.83 0,36.83
  pour GND: 0,0 36.83,0 36.83,36.83 0,36.83
  pour Top: 0,0 36.83,0 36.83,36.83 0,36.83
I2C_SCL
  5V 0.254: JP2.5 36.07,25.27 34.8,26.54 34.8,28.57 32.26,31.11 32.26,32.64 31.5,33.4 29.59,33.4 J5.4
  Bottom 0.203: IC2.19 29.32,26.05 29.21,26.16 29.21,27.69 29.34,27.81 29.34,28.07 28.45,28.96 28.45,29.94 R18.1 28.7,30.1 28.96,30.35 28.96,31.24 29.34,31.62 29.34,33.66 J5.4
I2C_SDA
  5V 0.254: JP2.6 35.81,23.24 34.92,24.13 34.92,25.65 34.29,26.29 34.29,28.32 31.62,30.99 29.46,30.99 J5.3
  Bottom 0.203: IC2.20 29.82,26.08 29.69,26.21 29.69,26.24 29.64,26.34 29.64,27.48 29.72,27.56 29.72,29.84 29.34,30.23 29.34,30.99 29.72,31.37 29.72,34.8 28.83,35.69 27.81,35.69 27.3,35.18 27.3,33.15 J5.3 28.32,31.02 R19.1 28.42,30.86
LINKLED  (via drill 0.4)
  5V 0.254: v26.67,7.11 20.57,13.21 v18.67,13.21
  Bottom 0.203: R2.1 9.4,13.97 11.68,16.26 12.83,16.26 13.97,15.11 15.24,15.11 16.26,14.1 16.26,13.46 16.51,13.21 v18.67,13.21
  Bottom 0.254: v26.67,7.11 26.92,6.86 27.3,6.86 27.81,6.35 27.81,5.37 IC4.25
MOSI
  5V 0.254: JP2.3 36.07,29.97 34.67,31.37 34.67,33.4 J5.8
  Bottom 0.254: J5.8 33.4,33.56 C25.2 R16.1
N$1  (via drill 0.4)
  Top 0.254: U1.P$4 11.05,20.32 8.26,17.53 v8.26,16.89
  Bottom 0.254: C8.2 8.13,16.76 v8.26,16.89 8.28,16.86 R1.1
N$2
  Bottom 0.254: C15.2 16.06,30.61 FTDI-RESET.1
N$3  (via drill 0.4)
  Top 0.254: D5.B 7.43,8.26 5.08,8.26 4.83,8.51 v4.83,9.27
  Bottom 0.254: v4.83,9.27 R6.2
N$4  (via drill 0.9)
  Top 0.813: L1.1 8.13,3.06 C3.1 8.11,1.91 6.99,1.91 6.86,1.78 | D1.C 6.11,1.02 6.86,1.78 | v5.46,2.92 5.59,2.92 6.22,2.29 6.35,2.29 6.86,1.78
  Bottom 0.813: D2.C 3.81,1.27 v5.46,2.92
N$5  (via drill 0.4)
  Top 0.254: D5.G 7.43,9.02 6.1,9.02 v5.84,9.27
  Bottom 0.254: v5.84,9.27 R5.2
N$6
  Bottom 0.61: F1.2 2.54,29.72 D4.2 3.56,28.7 4.32,27.94 C12.2
N$7  (via drill 0.6)
  Top 0.406: v1.91,34.42 2.54,33.78 3.53,33.78 U2.1
  Bottom 0.406: F1.1 2.54,35.05 v1.91,34.42
N$8
  Bottom 0.203: Y1.2 21.46,22.61 21.84,22.99 22.99,22.99 23.04,23.04 | 23.04,23.04 23.88,23.04 24.21,22.71 24.9,22.71 IC2.7 | 22.63,25.63 22.86,25.4 22.86,23.22 23.04,23.04
  Bottom 0.254: R13.2 22.63,25.63 | Y1.2 21.46,19.56 21.97,19.05 21.97,18.51 C16.2
N$9
  Bottom 0.254: U1.P$2 C7.2
N$10
  Bottom 0.254: J14.1 J5.6
N$11
  Bottom 0.254: U1.P$1 13.56,24.13 C6.2
N$12
  Bottom 0.203: C17.2 21.69,26.13 21.97,26.42 23.19,26.42 23.32,26.29 23.32,25.93 R13.1 23.37,25.68 23.37,23.62 23.5,23.5 24,23.5 24.27,23.23 IC2.8
  Bottom 0.254: C17.2 21.69,24.48 Y1.1
N$13
  Top 0.813: D1.A 9.12,5.33 J2.1
N$15  (via drill 0.4)
  Top 0.254: D5.R 7.23,7.37 7.87,7.37 8.51,8 v8.51,8.64
  Bottom 0.254: v8.51,8.64 8.48,8.61 R4.2
N$16  (via drill 0.4)
  Top 0.254: U2.3 4.57,32.51 4.95,32.13 v5.21,32
  Bottom 0.254: R10.2 6.63,32.26 6.48,32.26 5.97,31.75 Z1.1 5.6,31.73 v5.21,32
N$17  (via drill 0.4)
  Top 0.254: U2.2 3.58,33.15 4.57,33.15 v5.21,33.78
  Bottom 0.254: v5.21,33.78 5.45,34.02 Z2.1 5.97,34.16 6.35,34.54 6.63,34.54 R11.2
N$18
  Bottom 0.254: IC1.31 13.76,30.5 C15.1
N$19
  Bottom 0.813: L4.1 25.18,35.34 | 25.18,35.34 25.78,34.73 J5.2 | C18.2 24.91,35.34 25.18,35.34
N$20  (via drill 0.4)
  Top 0.254: 27.04,10.02 v26.92,9.91 27.05,10.03 29.97,10.03 30.48,9.53 C21.1
  Bottom 0.254: IC4.20 28.21,9.03 27.81,8.64 27.18,8.64 26.8,9.02 26.8,9.78 v26.92,9.91
N$21  (via drill 0.4)
  Top 0.254: U2.S1 3.73,35.56 5.08,35.56 5.46,35.94 v5.59,35.94 5.59,35.7 Z2.2 5.97,33.15 5.71,32.89 v5.21,32.89
  Top 0.61: U2.S1 3.23,36.07 1.91,36.07 1.57,35.74 U2.S2 0.64,34.54 0.31,34.22 U2.S3 0.76,33.06 0.76,32.13 0.31,31.68 U2.S4 0.31,30.68 0.64,30.35 U2.S5 0.81,29.11 U2.S6
  Bottom 0.254: v5.59,35.94 5.97,35.56 Z2.2 | Z1.2 5.83,32.89 v5.21,32.89
  Bottom 0.406: L3.1 0.91,29.02 U2.S5
N$22
  Bottom 0.254: IC4.22 28.6,8.03 28.32,7.75 28.32,6.76 C20.1
N$23
  Bottom 0.254: R14.2 26.77,15.49 IC4.10
N$24
  Bottom 0.254: IC4.36 J9.1
N$25
  Bottom 0.254: IC2.29 32,21.73 32,21.72 32.89,21.72 33.66,20.95 J12.1
N$67
  Bottom 0.254: R3.2 7.62,14.99 7.11,15.49 4.19,15.49 2.92,14.22 2.92,12.95 U1.P$14
N$321  (via drill 0.4)
  Top 0.254: U1.P$3 13.34,21.59 13.08,21.84 9.91,21.84 9.4,22.35 8,22.35 7.11,21.46 6.48,21.46 5.21,20.19 v4.45,20.19
  Bottom 0.254: 5.06,20.19 v4.45,20.19 4.32,20.07 C9.2 | 5.06,20.19 RN2.7 | 5.06,20.19 5.06,20.27 RN2.8
N$332
  Bottom 0.254: R2.2 7.87,13.97 6.86,14.99 4.45,14.99 3.56,14.1 3.56,11.94 2.29,10.67 1.02,10.67 0.51,11.18 0.51,21.25 U1.P$12
POE_DC_RETURN
  Bottom 0.61: U$7.P2 33.66,4.83 34.16,4.32 34.16,3.94 C4.1 33.66,3.08 U$7.P1 33.53,2.54 32.77,1.78 32.77,1.03 C5.1 31.61,0.89 L2.1
POE_VIN+
  5V 0.61: U1.P$9 15.88,13.97 16.38,14.48 16.38,20.83 U$7.P6 U$7.P5
  Bottom 0.813: U1.P$9 14.73,11.29 D3.C
POE_VIN-
  5V 0.61: U$7.P8 U$7.P7 15.24,5.08 13.97,6.35 13.97,10.92 U1.P$10
  Bottom 0.813: U1.P$10 12.19,11.55 D3.A
RD+
  Bottom 0.254: IC1.14 7.86,32.5 7.62,32.26 7.62,32.13 7.14,31.65 R10.1
RD-
  Bottom 0.254: IC1.15 7.89,33 7.62,33.27 7.62,33.66 7.49,33.78 7.14,33.78 R11.1
RESET  (via drill 0.4)
  Top 0.254: v2.54,9.65 2.54,10.41 2.92,10.79 2.92,21.34 3.56,21.97 6.86,21.97 8.26,23.37 11.05,23.37 11.68,24 12.7,24 | v20.83,6.35 20.83,6.48 20.45,6.86 20.45,18.29 | 20.45,18.29 22.48,20.32 22.99,20.32 v23.24,20.57 | 12.7,24 13.97,22.73 15.24,22.73 19.68,18.29 20.45,18.29 | 12.7,24 12.7,25.53 14.1,26.92 16.38,26.92 v16.64,26.67 | v31.24,27.3 31.37,27.43 31.5,27.43 31.75,27.69 31.75,30.23 32.26,30.73 33.66,30.73 34.54,31.62 34.54,32.77 35.94,34.16 35.94,34.54 JP2.1
  5V 0.254: v31.24,27.3 31.24,26.29 30.99,26.04 30.86,26.04 29.72,24.89 26.04,24.89 24,22.86 24,21.34 v23.24,20.57
  Bottom 0.203: 24.91,21.21 24.26,21.21 23.75,20.7 23.37,20.7 v23.24,20.57 | IC3.3 21.66,2.47 21.59,2.54 21.08,2.54 20.83,2.79 20.83,2.92 20.57,3.17 20.57,3.3 20.32,3.56
  Bottom 0.254: C10.1 2.26,8.99 v2.54,9.65 | 24.91,21.21 IC2.4 | 20.32,3.56 20.32,5.84 v20.83,6.35 | R15.1 16.07,29.72 FTDI-RESET.2 16.64,29.52 v16.64,26.67
RXIN
  Bottom 0.203: RN1.6 10.18,19.83 11.68,21.34 12.7,21.34 13.97,20.07 17.53,20.07 18.54,19.05 | IC4.5 24.27,15 24.38,15.11 24.38,16.64 23.62,17.4 22.73,17.4 22.61,17.27 20.29,17.27
  Bottom 0.254: 20.29,17.27 20.29,17.3 18.54,19.05
RXIN_E  (via drill 0.4)
  Top 0.254: v9.14,21.59 9.14,21.23 v7.57,19.86
  Bottom 0.254: RN2.2 v7.57,19.86 RN1.3 | C7.1 9.93,22.38 v9.14,21.59
RXIP
  Bottom 0.203: RN1.5 9.75,20.57 10.29,20.57 11.56,21.84 12.95,21.84 14.22,20.57 17.78,20.57 20.7,17.65 22.35,17.65 22.48,17.78 23.88,17.78 24.89,16.76 24.89,15.11 24.77,14.99 IC4.6
RXIP_E
  Bottom 0.254: C6.1 10.16,24.26 8.38,22.48 8.38,20.67 RN1.4 RN2.1
SCLK
  5V 0.254: JP2.4 35.81,28.32 34.04,30.1 34.04,30.13 33.43,30.73 33.43,32.1 J5.7
  Bottom 0.254: J5.7 33.43,32.1 C26.2 R17.1
TXON
  Bottom 0.203: RN1.8 11.12,18.23 11.68,18.8 12.7,18.8 13.97,17.53 17.14,17.53 18.67,16 18.67,15.24
  Bottom 0.254: IC4.1 19.52,14.23 19.52,14.26 19.43,14.35 19.43,14.48 18.67,15.24
TXON_E
  Bottom 0.254: RN2.4 RN1.1 8.57,18.23 9.27,17.53 11.94,17.53 U1.P$6
TXOP
  Bottom 0.203: RN1.7 9.71,19.05 11.18,19.05 11.43,19.3 12.83,19.3 14.1,18.03 17.27,18.03 18.8,16.51
  Bottom 0.254: IC4.2 22.77,15.08 22.48,15.37 19.66,15.37 19.66,15.39 19.56,15.49 19.56,15.75 18.8,16.51
TXOP_E  (via drill 0.4)
  Top 0.254: v7.57,19.02 v7.58,19.03 8.49,19.03 10.79,21.34 12.83,21.34 14.48,19.68 14.48,19.3 U1.P$5
  Bottom 0.254: RN2.3 7.75,19.03 | 7.75,19.03 RN1.2 | v7.57,19.02 7.57,18.85 7.75,19.03
USBRXD
  Bottom 0.254: IC1.30 13.22,31 13.46,31.24 13.62,31.24 R9.1
USBTXD
  Bottom 0.254: R8.1 11.56,28.7 11.81,28.96 11.81,29.43 IC1.2
USBVCC
  Bottom 0.61: D4.1 5.97,27.4 USBVCC.1
VIN  (via drill 0.9)
  Top 0.813: C2.1 10.02,2.03 L1.2 10.16,3.32 10.16,3.81 v12.38,6.03 12.94,6.59 C1.+ 15.48,6.59 v15.88,6.99
  5V 0.813: IC5.P$1 19.01,28.24 19.94,27.3 19.94,21.84 17.78,19.94 17.78,13.59 15.88,11.43 v15.88,6.99 | v12.38,6.03 17.78,0.64 30.48,0.64 31.88,2.03 31.88,3.17 v32.64,3.81
  Bottom 0.61: C31.1 19.01,34.28 IC5.P$1 | L2.2 31.61,2.78 v32.64,3.81
  Bottom 0.813: IC5.P$1 18.16,35.26 D6.1
WIZRST
  Bottom 0.203: IC4.37 19.68,6.14 19.68,2.87 IC3.2
XTLN
  Bottom 0.254: IC4.30 25.27,4.32 25.12,4.16 R20.2 25.12,3.58 26.16,2.54 28.07,2.54 Y2.2 29.56,2.51 C28.2
XTLP
  Bottom 0.203: IC4.31 24.77,4.55 R20.1
  Bottom 0.254: R20.1 24.16,2.77 24.51,2.41 Y2.1 23.78,2.51 C27.2

## Text on the board
_bsilk: 5V | SCL | NA | MOSI | R | GND | SDA | A0 | SKAARHOJ 2016 | SKAARDUINO-POE V4.2 | GND | DC-IN